# EAGLE board trashotron-slimezistor (EAGLE 9.6.2)
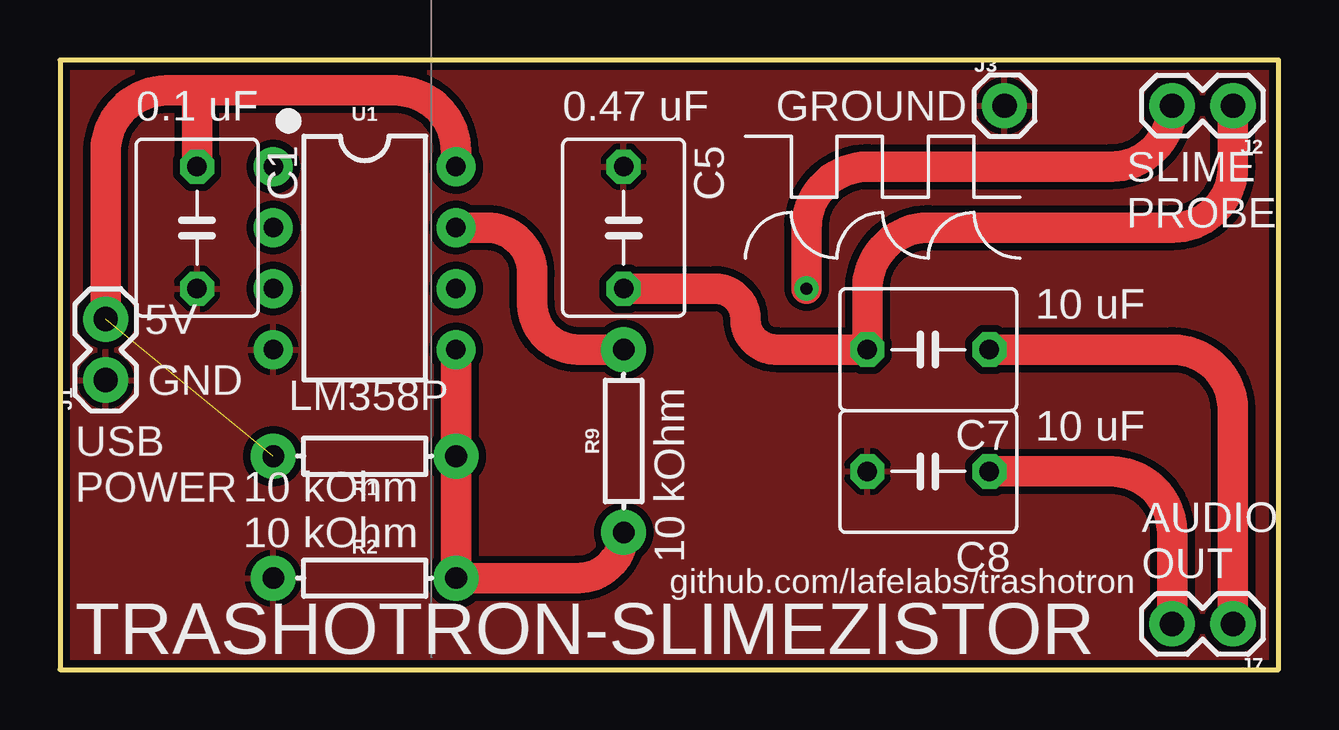
[diagram p0: board, top side]
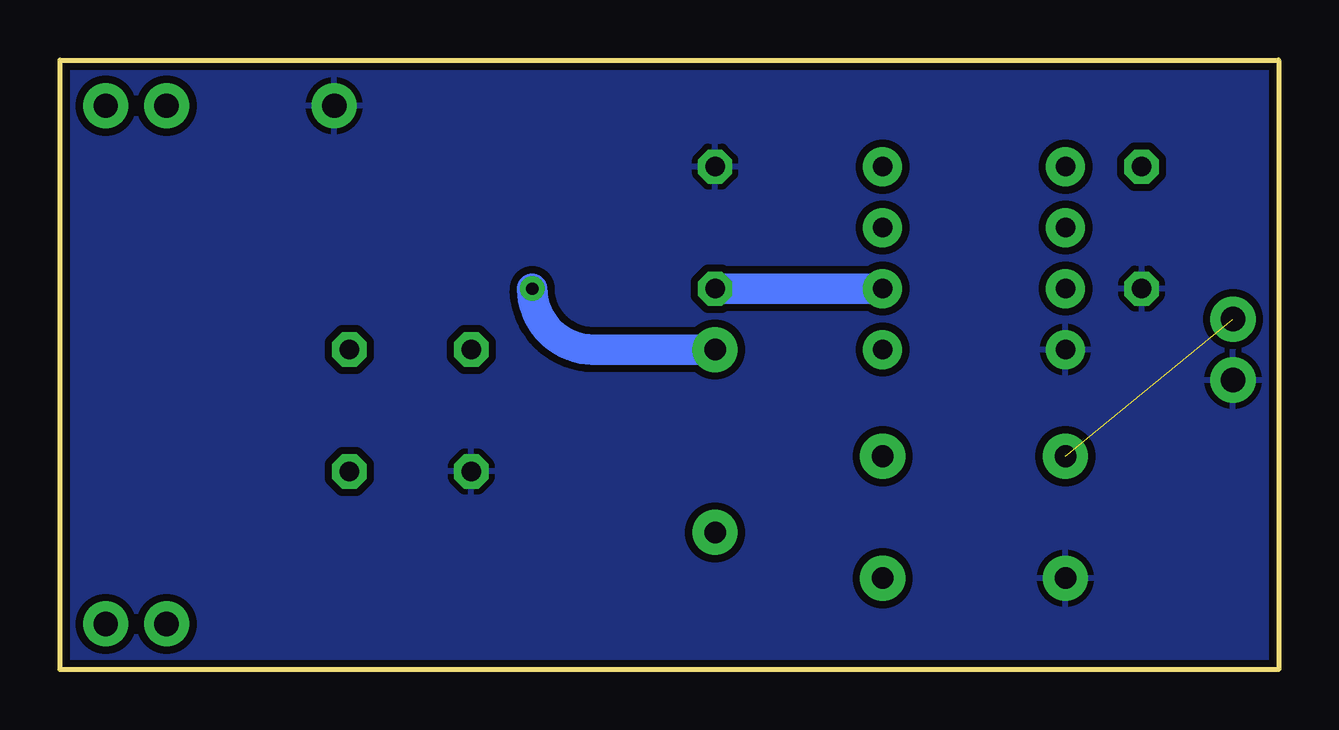
[diagram p1: board, bottom side, seen from below]

Size 50.8 x 25.4 mm. Coordinates in mm from the lower left corner, seen from the top.
Outline: 0,25.4 0,0 50.8,0 50.8,25.4 0,25.4
Copper layers (1*16): Top 0.035mm / dielectric 1.5mm / Bottom 0.035mm
Design rules "default": minimum track width 8mil, minimum drill 20mil, track to track 8mil, track to pad 8mil, pad to pad 8mil, via to via 8mil, smd to smd 8mil, copper to edge 10mil, drill to drill 8mil, minimum pad ring 12mil, minimum via ring 10mil, stop-mask expansion 4mil, vias tented up to drill 25mil, thermal gap 10mil
Net classes: 0 default: width 0.203 mm; 1 vcc: width 0.254 mm

## Footprints (pad centres in the part's own frame; a part is rotated, then mirrored left to right if it is on the bottom)
C050-050X075 = drill 0.813 octagon: 1 -2.54,0; 2 2.54,0
1X02 = drill 1.016 pad 1.88: 1 0,0; 2 2.54,0
1X01 = drill 1.016 pad 1.88: 1 0,0
AXIAL-0.3 = drill 0.9 pad 1.88: P$1 -3.81,0; P$2 3.81,0
DIP08 = drill 0.813 pad 1.626: 1 -3.81,-3.81; 2 -1.27,-3.81; 3 1.27,-3.81; 4 3.81,-3.81; 5 3.81,3.81; 6 1.27,3.81; 7 -1.27,3.81; 8 -3.81,3.81

## Placement (x,y rotation side)
C1  [C050-050X075]  5.71,18.41 270 top
C5  [C050-050X075]  23.5,18.41 270 top
C7  [C050-050X075]  36.2,13.34 180 top
C8  [C050-050X075]  36.2,8.26 180 top
J1  [1X02]  1.91,12.06 90 top
J2  [1X02]  48.9,23.5 180 top
J3  [1X01]  39.37,23.5 0 top
J7  [1X02]  48.9,1.91 180 top
R1  [AXIAL-0.3]  12.7,8.89 180 top
R2  [AXIAL-0.3]  12.7,3.81 0 top
R9  [AXIAL-0.3]  23.5,9.53 90 top
U1  LM358  [DIP08]  12.7,17.14 270 top

## Library data of the parts
C1 C5 C7 C8 = rcl; SPICEPREFIX: C
J1-J3 J7 = SparkFun-Connectors
R1 R2 R9 = SparkFun-Resistors
U1 = SparkFun-IC-Amplifiers; PROD_ID: IC-09172

## Nets
GND: C1.2 C5.1 C8.2 J1.1 J3.1 R2.P$1 U1.4
N$5: J2.2 R9.P$2 U1.7
N$10: R1.P$1 R2.P$2 R9.P$1 U1.5
N$12: C5.2 C7.2 J2.1 U1.6
N$14: C8.1 J7.2
N$16: C7.1 J7.1
VCC: C1.1 J1.2 R1.P$2 U1.8

## Tracks (layer width: path | path; a pad name or v marks a point on that pad's centre or on a via)
GND
  pour Top (isolate 0.305): 0,25.4 50.8,25.4 50.8,0 0,0
  pour Bottom (isolate 0.305): 0,25.4 50.8,25.4 50.8,0 0,0
N$5  (via drill 0.51)
  Top 1.27: R9.P$2 21.59,13.34 arc-90 19.68,15.24 19.68,16.51 arc90 17.78,18.41 U1.7 | v31.11,15.88 31.11,18.41 arc-90 33.66,20.95 43.81,20.95 arc90 J2.2
  Bottom 1.27: R9.P$2 28.57,13.34 arc90 v31.11,15.88
N$10
  Top 1.27: U1.5 R1.P$1 R2.P$2 21.59,3.81 arc90 R9.P$1
N$12
  Top 1.27: J2.1 48.9,20.95 arc-90 46.35,18.41 36.2,18.41 arc90 33.66,15.88 C7.2 29.84,13.34 arc-90 28.57,14.61 arc90 27.3,15.88 C5.2
  Bottom 1.27: U1.6 C5.2
N$14
  Top 1.27: J7.2 46.35,5.71 arc90 43.81,8.26 C8.1
N$16
  Top 1.27: J7.1 48.9,10.79 arc90 46.35,13.34 C7.1
VCC  (1 unrouted)
  Top 1.27: J1.2 1.91,21.59 arc-90 4.45,24.13 5.71,24.13 | U1.8 16.51,21.59 arc90 13.97,24.13 5.71,24.13 | C1.1 5.71,24.13

## Text on the board
tPlace: 0.1 uF | 0.47 uF | GROUND | SLIME / PROBE | 5V | 10 uF | GND | LM358P | 10 uF | USB / POWER | 10 kOhm | 10 kOhm | 10 kOhm | AUDIO / OUT | github.com/lafelabs/trashotron | TRASHOTRON-SLIMEZISTOR
tValues: Tent Vias! | Arduino Wee v1.3